# EAGLE board Ex EEPROM (EAGLE 7.6.0)

Size 26.5 x 18 mm. Coordinates in mm from the lower left corner, seen from the top.
Outline: 0,0 26.5,0 26.5,18 0,18 0,0
Copper layers (1*16): Top 0.035mm / dielectric 1.5mm / Bottom 0.035mm
Design rules "default": minimum track width 10mil, minimum drill 24mil, track to track 8mil, track to pad 8mil, pad to pad 8mil, via to via 8mil, smd to smd 8mil, copper to edge 40mil, drill to drill 8mil, minimum pad ring 10mil, minimum via ring 8mil, stop-mask expansion 4mil, vias tented up to drill 0mil, thermal gap 10mil

## Footprints (pad centres in the part's own frame; a part is rotated, then mirrored left to right if it is on the bottom)
SO-08 = smd 0.6 x 2.2: 1 -1.905,-2.6; 2 -0.635,-2.6; 3 0.635,-2.6; 4 1.905,-2.6; 5 1.905,2.6; 6 0.635,2.6; 7 -0.635,2.6; 8 -1.905,2.6
C1206 = smd 1.6 x 1.8: 1 -1.4,0; 2 1.4,0
1X10-BIG = drill 1.016 pad 1.778 octagon: 1 -11.43,0; 2 -8.89,0; 3 -6.35,0; 4 -3.81,0; 5 -1.27,0; 6 1.27,0; 7 3.81,0; 8 6.35,0; 9 8.89,0; 10 11.43,0
R1206 = smd 1.6 x 1.803: 1 -1.422,0; 2 1.422,0
SOLDERJUMPER_REFLOW = smd 1.168 x 1.6: 1 -0.762,0; 2 0.762,0

## Placement (x,y rotation side)
25AA1024_SOIJ8  25AA080SN  [SO-08]  35,12.6 270 top  (outside the outline)
C_0_1MF  [C1206]  25,9 270 top
NUSBIO_IN  PINHD-1X10  [1X10-BIG]  13.33,1.5 180 top
R_CS_PUP  [R1206]  4,11.5 90 top
R_HOLD_PUP  [R1206]  11,11.5 90 top
WRITE_ENABLE  [SOLDERJUMPER_REFLOW]  6,5.3 0 top

## Library data of the parts
25AA1024_SOIJ8 = microchip; MF: MICROCHIP; MPN: 25AA080/SN; OC_FARNELL: 1816072; OC_NEWARK: 92C7351
C_0_1MF NUSBIO_IN R_CS_PUP R_HOLD_PUP = adafruit
WRITE_ENABLE = microbuilder

## Nets
CS: 25AA1024_SOIJ8.1 NUSBIO_IN.4 R_CS_PUP.2
GND: 25AA1024_SOIJ8.4 C_0_1MF.2 NUSBIO_IN.10
GPIO5: NUSBIO_IN.5
GPIO6: NUSBIO_IN.6
GPIO7: NUSBIO_IN.7
GPIO8: NUSBIO_IN.8
HOLD: 25AA1024_SOIJ8.7 R_HOLD_PUP.2
MISO: 25AA1024_SOIJ8.2 NUSBIO_IN.3
MOSI: 25AA1024_SOIJ8.5 NUSBIO_IN.2
N$1: 25AA1024_SOIJ8.3 WRITE_ENABLE.2
SCK: 25AA1024_SOIJ8.6 NUSBIO_IN.1
VCC: 25AA1024_SOIJ8.8 C_0_1MF.1 NUSBIO_IN.9 R_CS_PUP.1 R_HOLD_PUP.1 WRITE_ENABLE.1

## Tracks (layer width: path | path; a pad name or v marks a point on that pad's centre or on a via)
CS  (2 unrouted)
GND  (2 unrouted)
HOLD  (1 unrouted)
MISO  (1 unrouted)
MOSI  (1 unrouted)
N$1  (1 unrouted)
SCK  (1 unrouted)
VCC  (5 unrouted)

## Text on the board
tNames: Nusbio | Nusbio Thumb Drive | Nusbio Thumb Drive | VCC | GND | GND | VCC | 7 | 6 | 5 | 4 | 3 | 2 | 1 | 0
bNames: MadeInTheUSB.net | PCBv2 2016.12